# Altium PCB PCB2.PcbDoc
Units mil, origin at the board's own origin, x right, y up, seen from the top; angles counter-clockwise.
Board outline 6310 x 8345 mil, 2 copper layers (Top Layer, Bottom Layer); 65 components, 75 nets, 230 pads, 63 vias.
Unrouted connection lines stored in the file: 1.
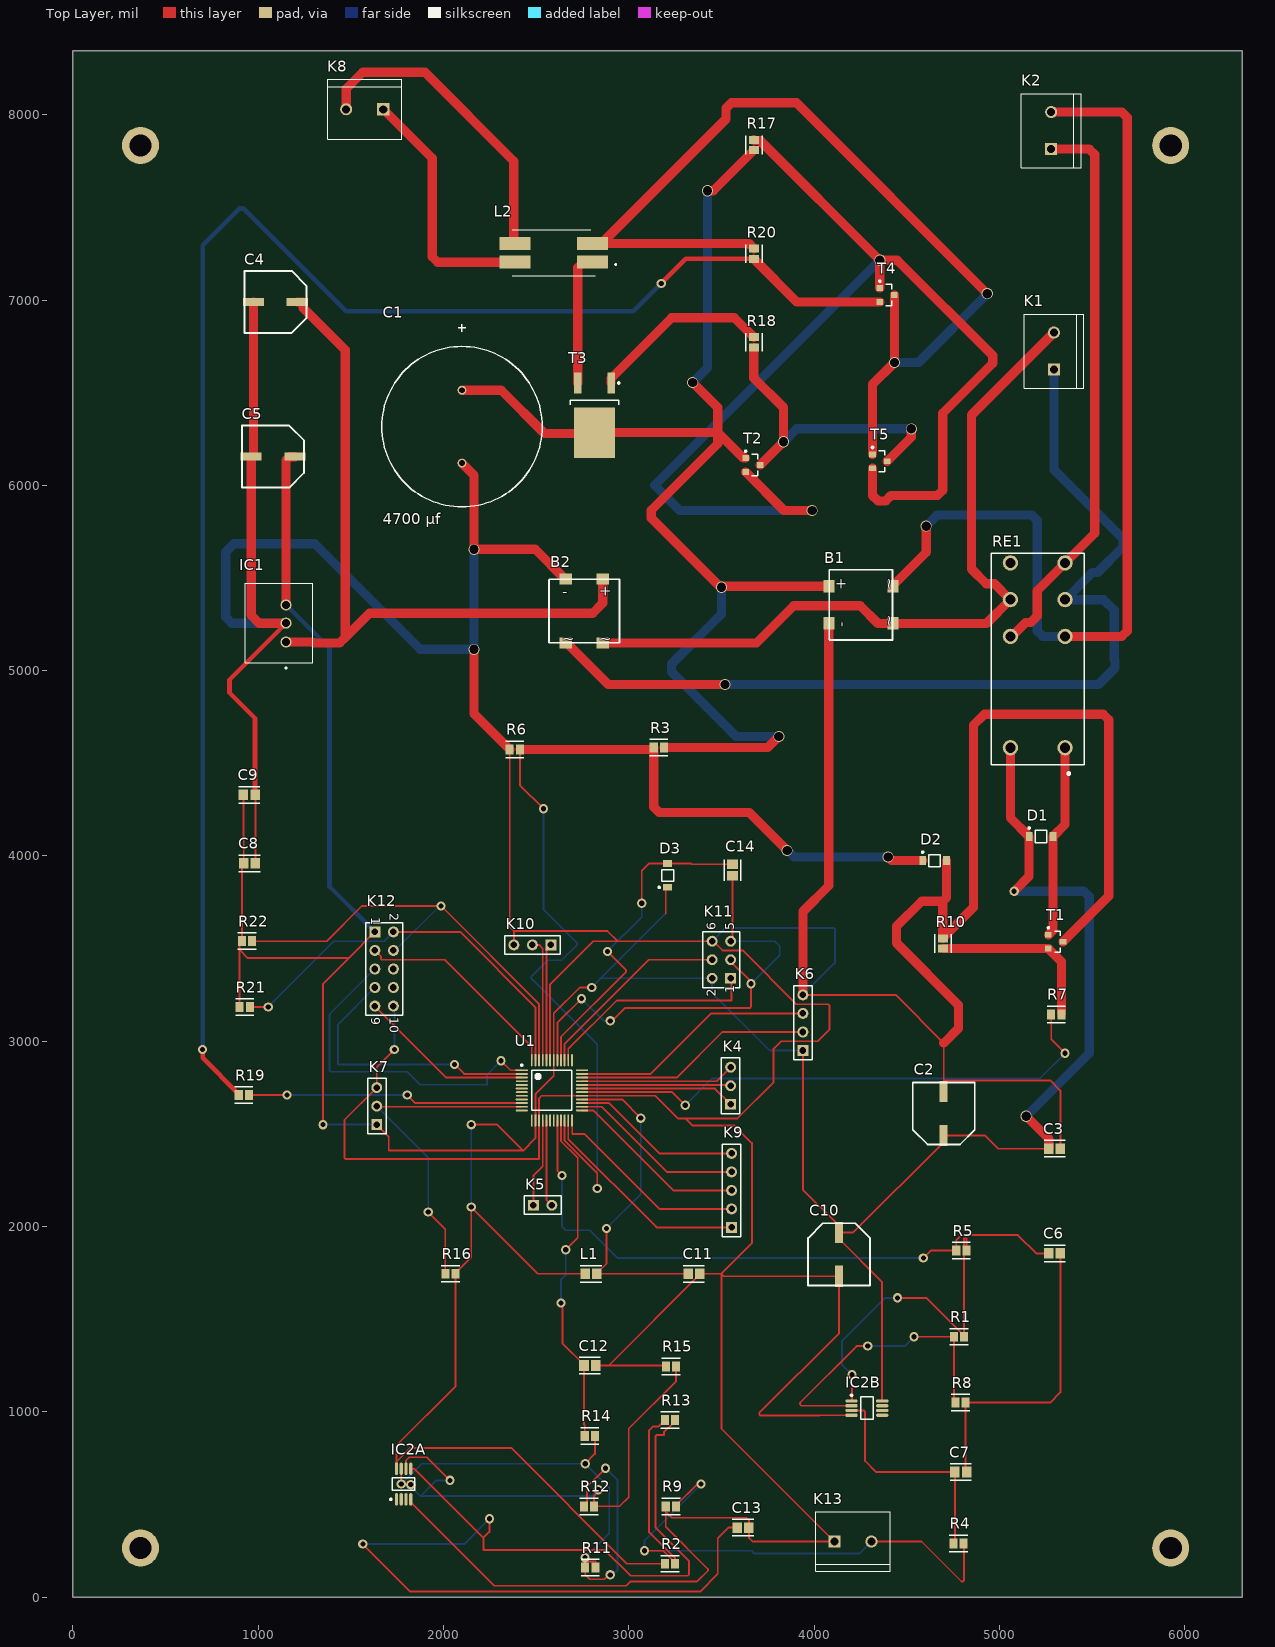
[diagram p0: Top Layer view]
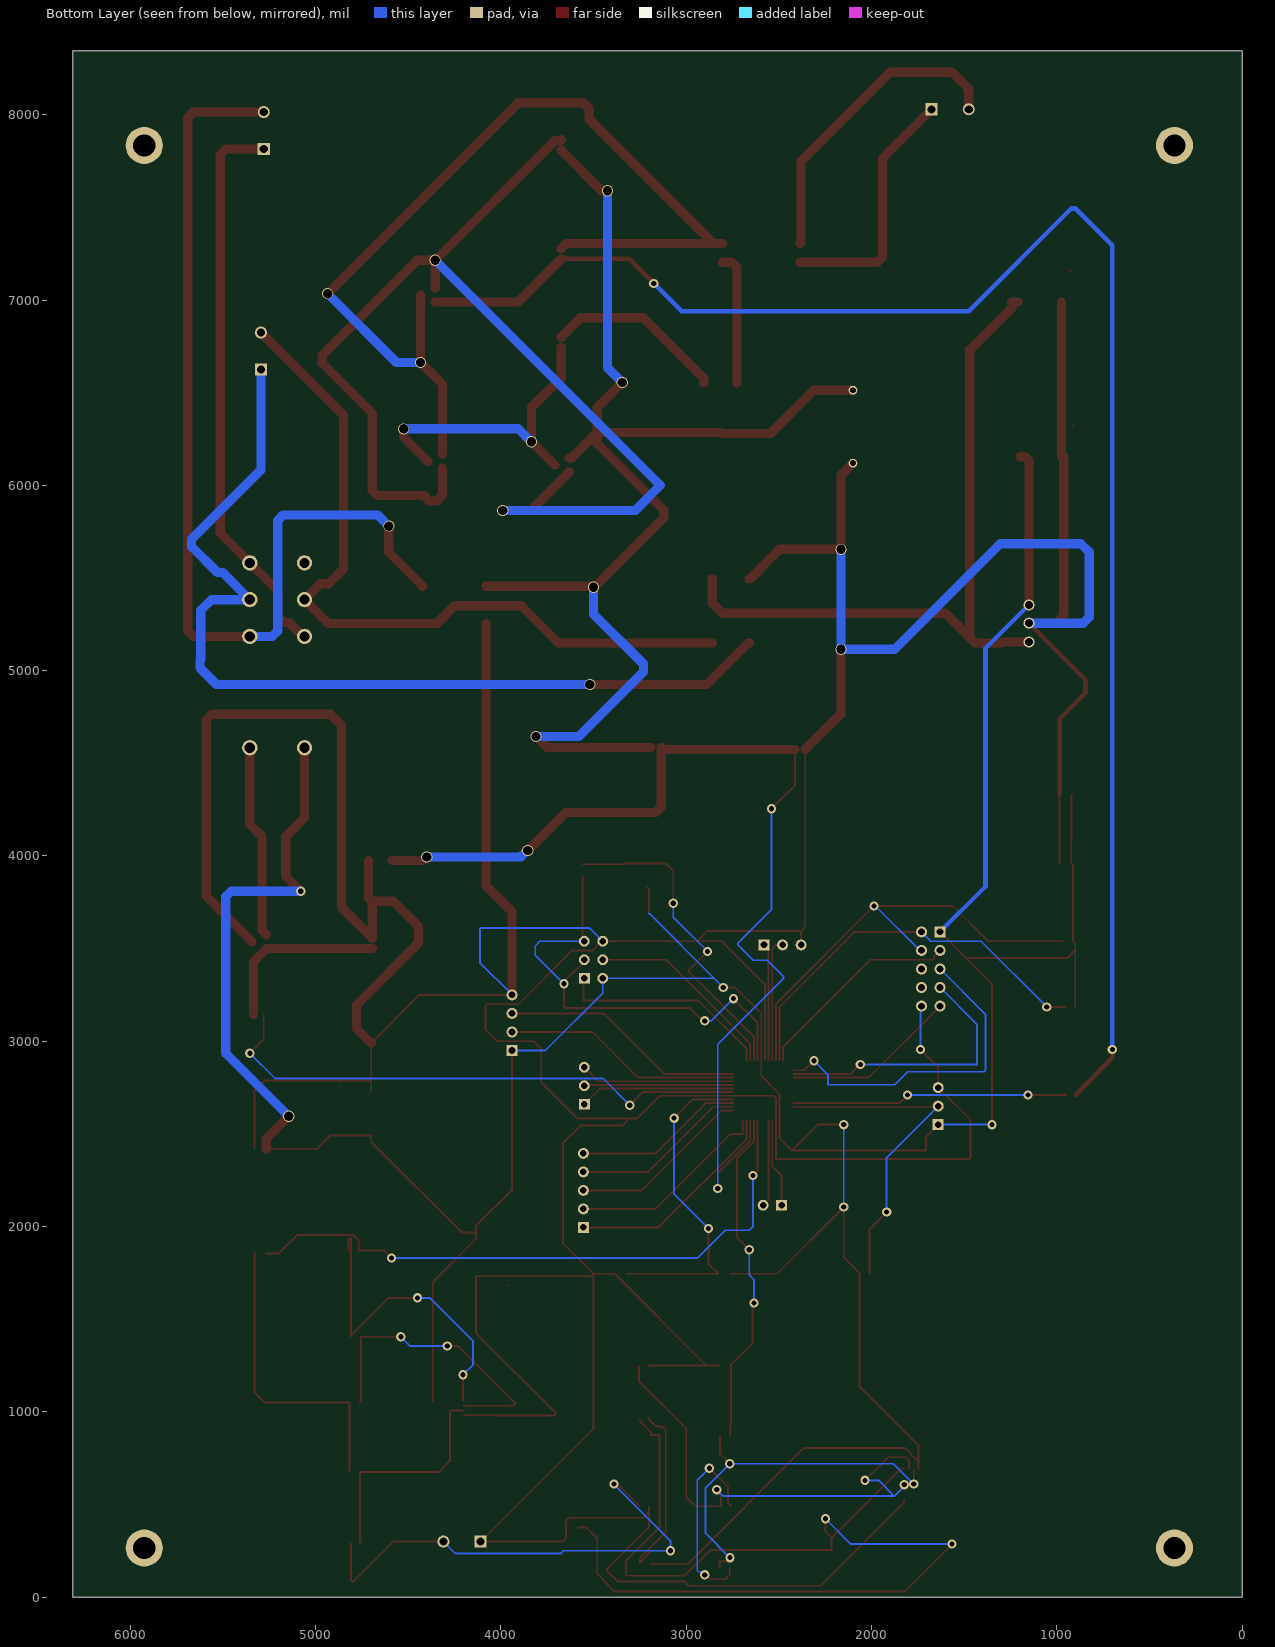
[diagram p1: Bottom Layer view, seen from below]
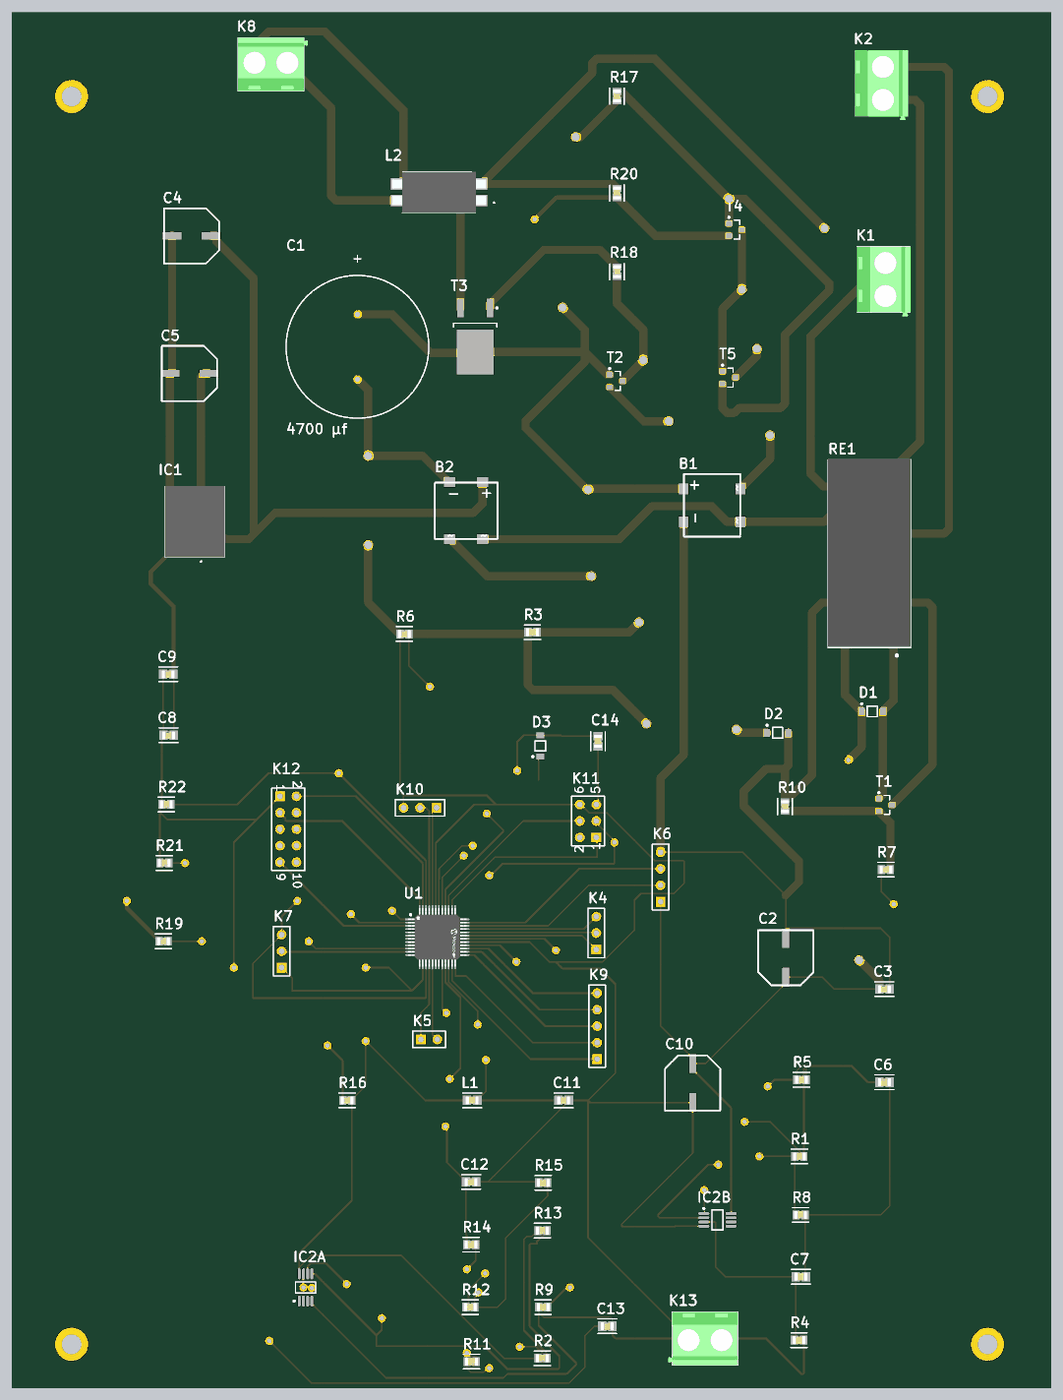
[diagram p2: 3D render of the assembled board from above, using the file's embedded part models]

## Layer stack, top to bottom
Top Solder: solder mask 0.4, Solder Resist, Dk 3.5
Top Layer: signal copper 1.4
Dielectric 1: dielectric 12.6, FR-4, Dk 4.8
Bottom Layer: signal copper 1.4
Bottom Solder: solder mask 0.4, Solder Resist, Dk 3.5

## Board outline
0,0 6310,0 6310,8345 0,8345

## Design rules (kind name [scope] priority, off if disabled: settings)
Clearance smd [All] p1: gap=10 ignorepadtopadclearanceinfootprint=TRUE except(0: Arc-Hole Track-Hole SMDPad-Hole THPad-Hole Via-Hole Fill-Hole Poly-Hole Region-Hole Text-Hole; 1: Arc-Arc Arc-Track Arc-SMDPad Arc-THPad Arc-Via Track-Track Track-SMDPad Track-THPad Track-Via SMDPad-SMDPad SMDPad-THPad SMDPad-Via THPad-THPad THPad-Via Via-Via)
PolygonConnect [All] p1: connectstyle=Relief reliefconductorwidth=10 reliefentries=4 polygonreliefangle="90 Angle" airgapwidth=10
RoutingVias [All] p1: holewidth=28 width=50 viastyle="Through Hole" minholewidth=28 minwidth=50 maxholewidth=28 maxwidth=50
SolderMaskExpansion [All] p1: expansion=4 istentingtop=FALSE
Width width [All] p1: maxlimit=50 minlimit=10 preferedwidth=10 minimp=50.000000 maximp=50.000000 favimp=50.000000
30 further rules are at their usual default settings.

## Classes and differential pairs
component class voeding: B1 B2 C1 C4 C5 D1 D2 IC1 K1 K2 R3 R6 R7 R10 RE1 T1
component class SolBout: K8 L2 R17 R18 R20 T2 T3 T4 T5
component class I2C: C2 C3 C6 C7 C12 C13 IC2A IC2B K13 R1 R2 R4 R5 R8 R9 R11 R12 R13 R14 R15
component class CPU: C8 C9 C10 C11 C14 D3 K4 K5 K6 K7 K9 K10 K11 K12 L1 R16 R19 R21 R22 U1

## Components (designator, comment, footprint, x,y, rotation, side; value= is the part's Value field where it differs from the comment)
B1 "D6KB6U" ttf 4255,5355 r90 top
B2 "D6KB6U" ttf 2760,5320 r0 top
C1 "4700 μf" CE_D22_L35_plugin 2100,6120 r90 top
C2 "10 uf" CE_D8_L10 4700,2610 r270 top
C3 "100 nf" CC_0805_L 5298.47,2420 r0 top value="0.22 μF"
C4 "100 μf   25V" CE_D8_L10 1093.11,6990 r0 top
C5 "10 μf   50V" CE_D8_L10 1080,6155 r0 top
C6 "10 nf" CC_0805_L 5298.47,1855 r0 top value="0.22 μF"
C7 "10 nf" CC_0805_L 4791.53,675 r0 top value="0.22 μF"
C8 "100 nf" CC_0805_L 953.47,3960 r0 top value="0.22 μF"
C9 "100 nf" CC_0805_L 951.53,4330 r0 top value="0.22 μF"
C10 "10 μf" CE_D8_L10 4135,1850 r90 top
C11 "100 nf" CC_0805_L 3351.53,1745 r0 top value="0.22 μF"
C12 "10nf" CC_0805_L 2790,1250 r0 top value="0.22 μF"
C13 "10nf" CC_0805_L 3616.53,375 r0 top value="0.22 μF"
C14 "100 nF" CC_0805_L 3560,3923.47 r270 top value="0.22 μF"
D1 "1N4007" SOD-123FL 5225,4105 r0 top value=15pF
D2 "5V1" SOD-123FL 4650.63,3975 r0 top
D3 "1N4148" SOD-123FL 3210,3895 r90 top value=15pF
IC1 "OKI-78SR-5/1.5-W36-C" OKI78SR515W36C 1150,5154.21 r90 top
IC2A "" MSOP_8_M 1785,610 r90 top
IC2B "" MSOP_8_M 4285,1020 r0 top
K1 "282837-2" TE_282837-2 5295,6725 r90 top
K2 "282837-2" TE_282837-2 5280,7915 r90 top
K4 "" HDR1X3 3550,2660 r90 top
K5 "" HDR1X2 2485,2115 r0 top
K6 "" HDR1X4 3940,2950 r90 top
K7 "" HDR1X3 1640,2550 r90 top
K8 "282837-2" TE_282837-2 1575,8030 r180 top
K9 "" HDR1X5 3555,1995 r90 top
K10 "" HDR1X3 2580,3520 r180 top
K11 "" HDR2X3 3550,3340 r90 top
K12 "" HDR2X5 1630,3590 r270 top
K13 "282837-2" TE_282837-2 4210,300 r0 top
L1 "10 μH" CC_0805_L 2796.53,1745 r180 top
L2 "" 2545 2595,7255 r90 top
R1 "18K" CC_0805_m 4782.41,1405 r180 top
R2 "1M" CC_0805_m 3222.41,180 r180 top
R3 "68K" CC_0805_m 3162.41,4585 r0 top
R4 "5K6" CC_0805_m 4780,290 r0 top
R5 "5K6" CC_0805_m 4795,1870 r0 top
R6 "10K" CC_0805_m 2385,4575 r0 top
R7 "10K" CC_0805_m 5307.59,3145 r0 top
R8 "100" CC_0805_m 4790,1050 r180 top
R9 "10M" CC_0805_m 3227.41,490 r0 top
R10 "4K7" CC_0805_m 4695,3527.59 r90 top
R11 "18K" CC_0805_m 2792.59,160 r180 top
R12 "18K" CC_0805_m 2785,490 r0 top
R13 "5K6" CC_0805_m 3222.59,955 r180 top
R14 "5K6" CC_0805_m 2790,870 r0 top
R15 "100" CC_0805_m 3227.59,1245 r0 top
R16 "4K7" CC_0805_m 2037.59,1745 r0 top
R17 "4K7" CC_0805_m 3675,7837.59 r270 top
R18 "100" CC_0805_m 3675,6772.41 r90 top
R19 "10K" CC_0805_m 922.59,2710 r0 top
R20 "4K7" CC_0805_m 3675,7250 r270 top
R21 "4K7" CC_0805_m 927.59,3185 r180 top
R22 "4K7" CC_0805_m 940,3540 r180 top
RE1 "" RT42 5207.36,4584.21 r90 top
T1 "BC547" SOT_23 5304.37,3537.4 r0 top
T2 "BC547" SOT_23 3670,6110 r0 top
T3 "IRF9Z34NPBF" TO_252 2815,6379.49 r270 top
T4 "BC547" SOT_23 4394.37,7027.6 r0 top
T5 "BC557" SOT_23 4355,6130 r0 top
U1 "ATMEGA4809" TQFP_48_M 2585,2735 r0 top

## Footprints (in the part's own frame and the unit in brackets; to place one, negate y for a bottom-side part, rotate by r counter-clockwise, add the part's x,y. Pads: shape width x height; smd on the part's side, far side on the other; paste and mask are expansions set on the pad)
2545 [mm]
  rect 1.78x4.27 smd: 1(-1.27,-5.305) 2(1.27,-5.305) 3(1.27,5.305) 4(-1.27,5.305)
  silkscreen extent -3.15,-8.6 3.15,5.69, body extent -3.15,-7.26 3.15,7.26, height 9.6
CC_0805_L [mil]
  rect 51.36x57.33 smd paste+0 mask+0: 1(-31.53,0) 2(31.53,0)
  silkscreen extent -57,-44 57,44, body extent -67,-39 67,39, height 10
CC_0805_m [mil]
  rect 43.49x53.39 smd paste+0 mask+0: 1(-27.59,0) 2(27.59,0)
  silkscreen extent -49,-44 49,44, body extent -53,-32 53,32, height 10
CE_D8_L10 [mm]
  rect 2.9x1.1 smd: 1(-3,0) 2(3,0)
  Top Layer lines w0.254: -4.25,4.241 -4.259,4.25
  silkscreen extent -4.26,-4.25 4.25,4.25
CE_D22_L35_plugin [mm]
  round 1.2 hole 0.8: 1(0,0) 2(10,0)
  silkscreen extent -6,-11 19.05,11
HDR1X2 [mm] "Connector; Header; 2 Position"
  rect 1.5x1.5 hole 0.9: 1(0,0)
  round 1.5 hole 0.9: 2(2.54,0)
  silkscreen extent -1.27,-1.27 3.81,1.27
HDR1X3 [mm] "Connector; Header; 3 Position"
  rect 1.5x1.5 hole 0.9: 1(0,0)
  round 1.5 hole 0.9: 2(2.54,0) 3(5.08,0)
  silkscreen extent -1.27,-1.27 6.35,1.27
HDR1X4 [mm] "Connector; Header; 4 Position"
  rect 1.5x1.5 hole 0.9: 1(0,0)
  round 1.5 hole 0.9: 2(2.54,0) 3(5.08,0) 4(7.62,0)
  silkscreen extent -1.27,-1.27 8.89,1.27
HDR1X5 [mm] "Connector; Header; 5 Position"
  rect 1.5x1.5 hole 0.9: 1(0,0)
  round 1.5 hole 0.9: 2(2.54,0) 3(5.08,0) 4(7.62,0) 5(10.16,0)
  silkscreen extent -1.27,-1.27 11.43,1.27
HDR2X3 [mm] "Connector; Header; 3x2 Position"
  rect 1.5x1.5 hole 0.9: 1(0,0)
  round 1.5 hole 0.9: 2(0,2.54) 3(2.54,0) 4(2.54,2.54) 5(5.08,0) 6(5.08,2.54)
  silkscreen extent -1.27,-1.27 6.35,3.81
HDR2X5 [mm] "Connector; Header; 5x2 Position"
  rect 1.5x1.5 hole 0.9: 1(0,0)
  round 1.5 hole 0.9: 2(0,2.54) 3(2.54,0) 4(2.54,2.54) 5(5.08,0) 6(5.08,2.54) 7(7.62,0) 8(7.62,2.54) 9(10.16,0) 10(10.16,2.54)
  silkscreen extent -1.27,-1.27 11.43,3.81
MSOP_8_M [mm] "TSOP, 8-Leads, Body 3x3mm, Pitch 0.65mm, IPC Medium Density"
  oval 1.7x0.45 smd: 1(-2.1,0.975) 2(-2.1,0.325) 3(-2.1,-0.325) 4(-2.1,-0.975) 5(2.1,-0.975) 6(2.1,-0.325) 7(2.1,0.325) 8(2.1,0.975)
  silkscreen extent -2.22,-1.55 0.85,1.87, body extent -1.55,-1.55 1.55,1.55, height 1.1
OKI78SR515W36C [mm]
  round 1.519 hole 1.08: 1(0,0) 2(2.6,0) 3(5.1,0)
  silkscreen extent -3.6,-3.7 8.05,5.6, body extent -2.85,-3.7 8.05,5.6, height 16.6
RT42 [mm]
  round 2.1 hole 1.4: 11(20.3,3.75) 12(15.26,3.75) 14(25.34,3.75) 21(20.3,-3.75) 22(15.26,-3.75) 24(25.34,-3.75) A1(0,3.75) A2(0,-3.75)
  silkscreen extent -3.67,-6.35 26.65,6.35, body extent -2.21,-6.35 26.79,6.35, height 15.86
SOD-123FL [mm] "SOD, 2-Leads, Body 2.7x1.65mm"
  rect 0.91x1.22 smd: 1(-1.635,0) 2(1.635,0)
  silkscreen extent -1.76,-0.82 0.78,1.28, body extent -1.35,-0.82 1.35,0.82, height 1
SOT_23 [mm] "SOT23, 3-Leads, Body 2.92x1.3mm, Pitch 0.95mm"
  rect 0.9x0.8 smd: 1(-1,0.95) 2(-1,-0.95) 3(1,0)
  silkscreen extent -1.12,-1.46 0.65,2.02, body extent -0.65,-1.46 0.65,1.46, height 1.11
TE_282837-2 [mm]
  rect 1.65x1.65 / inner round 1.65 / far side rect 1.65x1.65 hole 1.1: 1(-2.54,0)
  round 1.65 hole 1.1: 2(2.54,0)
  silkscreen extent -5.08,-4.1 5.08,4.1, body extent -5.68,-4.1 5.08,4.1, height 10
TO_252 [mm] "DPAK, 3-Leads, Body 6.5x6.12mm, Pitch 2.28mm, IPC Low Density"
  rect 2.85x1 smd: 1(-4.4,2.28) 3(-4.4,-2.28)
  rect 6.9x5.65 smd: 2(2.4,0)
  silkscreen extent -4.52,-3.35 -1.45,3.46, body extent -2.05,-3.32 4.17,3.32, height 2.35
TQFP_48_M [mm]
  rect 1.655x0.252 smd paste+0 mask+0: 1(-4.125,2.75)
  rrect100% 1.655x0.252 smd paste+0 mask+0: 2(-4.125,2.25) 3(-4.125,1.75) 4(-4.125,1.25) 5(-4.125,0.75) 6(-4.125,0.25) 7(-4.125,-0.25) 8(-4.125,-0.75) 9(-4.125,-1.25) 10(-4.125,-1.75) 11(-4.125,-2.25) 12(-4.125,-2.75) 25(4.125,-2.75) 26(4.125,-2.25) 27(4.125,-1.75) 28(4.125,-1.25) 29(4.125,-0.75) 30(4.125,-0.25) 31(4.125,0.25) 32(4.125,0.75) 33(4.125,1.25) 34(4.125,1.75) 35(4.125,2.25) 36(4.125,2.75)
  rrect100% 0.252x1.655 smd paste+0 mask+0: 13(-2.75,-4.125) 14(-2.25,-4.125) 15(-1.75,-4.125) 16(-1.25,-4.125) 17(-0.75,-4.125) 18(-0.25,-4.125) 19(0.25,-4.125) 20(0.75,-4.125) 21(1.25,-4.125) 22(1.75,-4.125) 23(2.25,-4.125) 24(2.75,-4.125) 37(2.75,4.125) 38(2.25,4.125) 39(1.75,4.125) 40(1.25,4.125) 41(0.75,4.125) 42(0.25,4.125) 43(-0.25,4.125) 44(-0.75,4.125) 45(-1.25,4.125) 46(-1.75,4.125) 47(-2.25,4.125) 48(-2.75,4.125)
  silkscreen extent -4.25,-2.75 2.75,3.58, body extent -5.2,-5.2 5.2,5.2, height 0.25
ttf [mm]
  rect 1.7x1.5 smd: 1(2.54,4.445) 2(-2.54,4.445) 3(-2.54,-4.318) 4(2.54,-4.318)
  silkscreen extent -4.83,-4.3 4.83,4.4

## Part data
B1 B2: library part Bridge_Rectifier, Average Rectified Current-Max=0.8A, Forward Voltage=1V, Manufacturer="Diodes Inc", Package Description="4-Pin Small Outline Integrated Circuit, Body 4.7 x 3.8 mm, Pitch 2.5 mm", Package Reference=MiniDIP-4, Package Version=05/2016, Peak Current-Max=30A, Reverse Current-Max=5µA, Reverse Voltage-Max [Vrrm]=600V, Datasheet URL=http://www.diodes.com/_files/datasheets/ds17003.pdf, Datasheet Version="Rev. 13-2, 12/2010", Manufacturer URL=http://www.diodes.com/, Mounting Technology=SurfaceMount, Package URL=http://www.diodes.com/_files/packages/MiniDIP.pdf
C1 C2 C4 C5 C10: library part Capacitor_Electrolytic, Manufacturer=Panasonic, Max Operating Temperature="105 degC", Min Operating Temperature="-55 degC", Package Quantity=500, Voltage Rating="25 V", ComponentLink1Description="Manufacturer URL", ComponentLink1URL=http://www.panasonic.com/, ComponentLink2Description=Datasheet, ComponentLink2URL=http://industrial.panasonic.com/cdbs/www-data/pdf/RDE0000/ABA0000C1181.pdf, DatasheetVersion=03/2016, Height="10.2 mm", Lead Pitch="3.1 mm", Length="10.2 mm", Mount="Surface Mount", Mounting Technology="Surface Mount", PackageDescription="2-Pin Electrolytic Aluminum Capacitor, Body 8.3 x 8.3 mm", PackageReference=EEE-FK1E221P, Packaging="Tape and Reel", Pins=2, REACH SVHC="No SVHC", RoHSCompliant=true
C3 C6 C7 C8 C9 C11 C12 C13 C14: library part Capacitor_Ceramic, Capacitance="0.22 μF", Manufacturer=KEMET, Manufacturer Part Number=C0805C224K5RACTU, Package=C0805C-DN, Temperature="-55°C to +125°C", Temperature Characteristic=X7R, Temperature Coefficient=30ppm/°C, Temperature Range High=+125°C, Temperature Range Low=-55°C, Tolerance=0.1, Voltage Rating="50 V", Automotive=No, Category=Cap, ComponentLink2Description=Datasheet, ComponentLink2URL=https://content.kemet.com/datasheets/KEM_C1003_C0G_SMD.pdf, Device Class L1="Passive Components", Device Class L2=Capacitors, Device Class L3="Ceramic Capacitors", Digikey Description="CAP CER 0.22UF 50V X7R 0805", Height=0.88mm, Ipc Land Pattern Name=CAPC200125X78, Lead Free=Yes, Material=Ceramic, Mouser Description="CAP CER 0.22UF 50V X7R 0805", Octopart=https://octopart.com/c0805c224k5ractu-kemet-144670, RoHS=TRUE
D1: library part Diode, Capacitance=15pF, Forward Current=1A, Manufacturer=Diotec, Max Junction Temp=+175°C, Max Repetitive Reverse Voltage=1000V, Max Surge Forward Current=27A, Peak Reverse Current=5uA, Temperature="-50°C to +175°C", Temperature Range Low=-50°C, Automotive=No, Category=Diode, ComponentLink2Description=Datasheet, ComponentLink2URL=https://datasheet.octopart.com/1N4007-Diotec-datasheet-62346875.pdf, Device Class L1="Discrete Semiconductors", Device Class L2=Diodes, Device Class L3="Rectifier Diodes", Height=2.8mm, Ipc Land Pattern Name=DIOAD888W100L520D280, Lead Free=Yes, Manufacturer Part Number=1N4007, Octopart=https://octopart.com/1n4007-diotec-4040411, Package=1N4007, Reverse Voltage=1000V, RoHS=TRUE, Temperature Range High=+175°C
D2: library part Zener_Diode, Manufacturer="On Semiconductor", PartNumber=1SMB5920BT3G, ComponentLink1Description="Manufacturer URL", ComponentLink1URL=http://www.onsemi.com/, ComponentLink2Description=Datasheet, ComponentLink2URL=http://www.onsemi.com/pub_link/Collateral/1SMB5913BT3-D.PDF, ComponentLink3Description="Package Specification", ComponentLink3URL=http://www.onsemi.com/pub_link/Collateral/1SMB5913BT3-D.PDF, DatasheetVersion="Rev. 8", Mounting Technology="Surface Mount", PackageDescription="2-Pin Small Molded Package, J-Bend Lead, Body 4.33 x 3.625 mm", PackageReference=SMB-2-403A-03_H, PackageVersion="Rev. H, 05/2011", Packing="Tape and Reel", RoHS=Pb-Free, VZ Typ (V)=6.2
D3: library part Diode, Capacitance=15pF, Forward Current=1A, Manufacturer=Diotec, Manufacturer Part Number=1N4007, Max Junction Temp=+175°C, Max Repetitive Reverse Voltage=1000V, Max Surge Forward Current=27A, Peak Reverse Current=5uA, Temperature="-50°C to +175°C", Temperature Range Low=-50°C, Automotive=No, Category=Diode, ComponentLink2Description=Datasheet, ComponentLink2URL=https://datasheet.octopart.com/1N4007-Diotec-datasheet-62346875.pdf, Device Class L1="Discrete Semiconductors", Device Class L2=Diodes, Device Class L3="Rectifier Diodes", Height=2.8mm, Ipc Land Pattern Name=DIOAD888W100L520D280, Lead Free=Yes, Octopart=https://octopart.com/1n4007-diotec-4040411, Package=1N4007, Reverse Voltage=1000V, RoHS=TRUE, Temperature Range High=+175°C
IC1: library part "DC/DC Converter", Current - Output (Max)=1.5A, Manufacturer=Murata, Operating Temperature=-40degC~85degC, Package / Case=3-SIPModule, Power (Watts) - Manufacture Series=8W, Voltage - Input (Max)=36V, Voltage - Input (Min)=7V, Voltage - Isolation=-, Voltage - Output 1=5V, Applications=ITE(Commercial), Category=PowerSupplies-BoardMount, Datasheet URL=https://datasheet.ciiva.com/8006/1790439-8006672.pdf, Datasheet Version=Oct-13, Efficiency=90.5%, Family=DCDCConverters, Features=SCP, Manufacturer URL=http://www.murata.com/, Mounting Type=ThroughHole, Number of Outputs=1, Packaging=Tube, Power (Watts) - Max=8W, Series=Okami™OKI-78SR, Size / Dimension="0.41\"Lx0.30\"Wx0.65\"H(10.4mmx7.6mmx16.5mm)", Type=LinearRegulatorReplacement, Voltage - Output 2=-, Voltage - Output 3=-
IC2A IC2B: library part Dual_Opamp, Case/Package=PDIP, Input Bias Current=1pA, Input Offset Voltage (Vos)=4.5mV, Max Operating Temperature=125°C, Max Supply Voltage=6V, Min Operating Temperature=-40°C, Min Supply Voltage=1.8V, Nominal Supply Current=100uA, Operating Supply Voltage=5.5V, Output Current=23mA, Package Quantity=60, Power Supply Rejection Ratio (PSRR)=86dB, Voltage Gain=112dB, Amplifier Type="GENERAL PURPOSE", Bandwidth=1MHz, Common Mode Rejection Ratio=60dB, Gain Bandwidth Product=1MHz, Height=3.3mm, Input Offset Voltage-Max=4.5mV, Lead Free="Lead Free", Length=9.27mm, Mount="Through Hole", Number of Amplifiers=2, Number of Channels=2, Number Of Circuits=2, Number of Elements=2, Number of Pins=8, Operating Supply Current=100uA, Output Current per Channel=23mA, Packaging=Rail/Tube, Radiation Hardening=No, REACH SVHC="No SVHC", RoHS Compliant=Yes, Slew Rate=0.6V/µs, Slew Rate-Nom=0.6V/µs, Supply Current=100uA, Technology=CMOS, Unity Gain Bandwidth Product=1MHz, Width=6.35mm
K1 K2 K8 K13: "Ð Ð°Ð·ÑŠÐµÐ¼Ð½Ñ‹Ðµ ÐºÐ»ÐµÐ¼Ð¼Ð½Ñ‹Ðµ ÐºÐ¾Ð»Ð¾Ð´ÐºÐ¸ Ð Ð¾Ð·ÐµÑ‚ÐºÐ° 2 Ð¿Ð¾Ð»Ð¾Ð¶ÐµÐ½Ð¸Ñ 5,08 Ð¼Ð¼ ÐŸÑ€Ð¸Ð¿Ð¾Ð¹ Ð¿Ñ€ÑÐ¼Ð¾Ð¹ Ñ‡ÐµÑ€ÐµÐ· Ð¾Ñ‚Ð²ÐµÑ€ÑÑ‚Ð¸Ðµ 13,5 Ð / ÐºÐ¾Ð½Ñ‚Ð°ÐºÑ‚", Package=None, Availability="In Stock", Check_prices=https://www.snapeda.com/parts/282837-2/TE+Connectivity+AMP+Connectors/view-part/?ref=eda, MF="TE Connectivity", MP=282837-2, Price=None, Purchase-URL=https://pricing.snapeda.com/search/part/282837-2/?ref=eda, SnapEDA_Link=https://www.snapeda.com/parts/282837-2/TE+Connectivity+AMP+Connectors/view-part/?ref=snap
K4 K7 K10: library part "Header 3", "Header, 3-Pin", LatestRevisionDate=17-Jul-2002, LatestRevisionNote="Re-released for DXP Platform.", Publisher="Altium Limited"
K5: library part "Header 2", "Header, 2-Pin", LatestRevisionDate=17-Jul-2002, LatestRevisionNote="Re-released for DXP Platform.", Publisher="Altium Limited"
K6: library part "Header 4", "Header, 4-Pin", LatestRevisionDate=17-Jul-2002, LatestRevisionNote="Re-released for DXP Platform.", Publisher="Altium Limited"
K9: library part "Header 5", "Header, 5-Pin", LatestRevisionDate=17-Jul-2002, LatestRevisionNote="Re-released for DXP Platform.", Publisher="Altium Limited"
K11: library part "Header 3X2", "Header, 3-Pin, Dual row", LatestRevisionDate=17-Jul-2002, LatestRevisionNote="Re-released for DXP Platform.", Publisher="Altium Limited"
K12: library part "Header 5X2", "Header, 5-Pin, Dual row", LatestRevisionDate=17-Jul-2002, LatestRevisionNote="Re-released for DXP Platform.", Publisher="Altium Limited"
L1: library part Choke, Case/Package=1350, Current Rating=8.5A, DC Resistance (DCR)=14.1mR, Inductance=10uH, Inductance Tolerance=20%, Max Operating Temperature=155°C, Min Operating Temperature=-40°C, Package Quantity=1, Ratings=AEC-Q200, Resistor Type=Wirewound, Saturation Current=10A, Self Resonant Frequency=18MHz, Series Resistance=14.1R, Test Frequency=100kHz, Height=4.7mm, Height - Seated (Max)=0.197inch, Length=0.512inch, Max DC Current=8.5A, Mount="Surface Mount", Packaging="Tape and Reel", RMS Current (Irms)=8.5A, RoHS Compliant=Yes, Series=WE-HCI, Shielding=Shielded, Termination=SMD/SMT, Tolerance=20%, Width=12.8mm
L2: library part Common_Mode_Choke, Case/Package=1808, Current=2A, Current Rating=2.3A, DC Resistance (DCR)=60mR, Insulation Resistance=10MR, Max Operating Temperature=85°C, Max Voltage Rating (DC)=50V, Min Operating Temperature=-40°C, Package Quantity=1, Test Frequency=100MHz, DC Current=2A, DC Resistance-Max=60mR, Depth=4.7mm, Element Configuration=Dual, Height=2mm, Impedance=900R, Lead Free="Lead Free", Length=0.185inch, Max Current Rating=2A, Max DC Current=2A, Mount="Surface Mount", Number of Lines=2, Number of Pins=4, Packaging="Tape and Reel", Radiation Hardening=No, REACH SVHC="No SVHC", RoHS Compliant=Yes, Series=ACM, Termination=Flat, Voltage Rating=50V, Voltage Rating (DC)=50V, Width=4.5mm
R1 R2 R3 R4 R5 R6 R7 R8 R9 R10 R11 R12 R13 R14 R15 R16 R17 R18 R19 R20 R21 R22: library part Resistor, Manufacturer="Vishay Dale", Part Number=CRCW08050000Z0EA
RE1: library part RELAY_GENERAL_PURPOSE, Ambient Temperature Range High=+85°C, Ambient Temperature Range Low=-40°C, Coil Power=403mW, Coil Resistance=62Ω, Coil Voltage=5V, Current Rating=8A, Manufacturer="TE Connectivity", Manufacturer Part Number=RT424005, Automotive=No, Category=Relay, Coil Type=Non-Latching, ComponentLink2Description=Datasheet, ComponentLink2URL=https://www.te.com/commerce/DocumentDelivery/DDEController?Action=showdoc&DocId=Data+Sheet%7FRT2%7F1014%7Fpdf%7FEnglish%7FENG_DS_RT2_1014.pdf%7F5-1393243-9, Device Class L1=Electromechanical, Device Class L2=Relays, Device Class L3="Power Relays", Digikey Description="RELAY GENERAL PURPOSE DPDT 8A 5V", Height=15.7mm, Lead Free=Yes, Mouser Description="General Purpose Relay, Rt2 Series, Power, Non Latching, Dpdt, 5 Vdc, 8 A Rohs Compliant: Yes", Number Of Contacts=2, Octopart=https://octopart.com/5-1393243-9-te+connectivity-41835766, Package=RT424005, RoHS=TRUE, Throw Configuration=DPDT
T1 T2 T4: library part Transistor_NPN, Manufacturer="On Semiconductor", PartNumber=BC547C, ComponentLink1Description="Manufacturer URL", ComponentLink1URL=http://www.onsemi.com/, ComponentLink2Description=Datasheet, ComponentLink2URL=http://www.onsemi.com/pub_link/Collateral/BC546-D.PDF, ComponentLink3Description="Package Specification", ComponentLink3URL=http://www.onsemi.cn/pub_link/Collateral/2N6426-D.PDF, DatasheetVersion="Rev. 7", fT Min (MHz)=150, IC Continuous (A)=0.1, Mounting Technology="Through Hole", PackageDescription="3-Pin Transistor Outline, Body 4.825 x 3.685 mm, Pitch 1.27 mm", PackageReference=TO-92-3-29-11_AM_SL, PackageVersion="Rev. AM", Packing="Bulk Box", Polarity=NPN, RoHS=FALSE
T3: library part MOSFET_P, Continuous Drain Current Id=2.4A, Current Temperature=25°C, Drain Source Voltage Vds=20V, Manufacturer="Fairchild Semiconductor", On Resistance Rds(on)=52mohm, Operating Temperature Max=150°C, Operating Temperature Min=-55°C, Operating Temperature Range=-55°Cto+150°C, Package / Case=SOT-23, Package Description="3-Pin Small Outline Transistor, Body 2.92 x 1.4 mm, Pitch 0.95 mm", Package Reference=SSOT3L, Package Version="Rev. 3, 05/2015", Power Dissipation Pd=500mW, Pulse Current Idm=10A, Rds(on) Test Voltage Vgs=-4.5V, Threshold Voltage Vgs Typ=-800mV, Voltage Vds Typ=-20V, Voltage Vgs th Max=-1.5V, Current Id Max=2.4A, Datasheet URL=https://www.fairchildsemi.com/datasheets/FD/FDN304P.pdf, Datasheet Version="Rev. C, 01/2001", External Depth=2.5mm, External Length / Height=1.12mm, External Width=3.05mm, Full Power Rating Temperature=25°C, Manufacturer URL=https://www.fairchildsemi.com/, Mounting Technology=SurfaceMount, No. of Pins=3, Package URL=https://www.fairchildsemi.com/package-drawings/MA/MA03B.pdf, Reel Quantity=3000, SMD Marking=304P, SVHC=NoSVHC(19-Dec-2012), Tape Width=8mm, Termination Type=SMD, Transistor Case Style=SOT-23, Transistor Polarity=PChannel, Voltage Vds=20V, Voltage Vgs Max=-800mV, Voltage Vgs Rds on Measurement=-4.5V
T5: library part Transistor_PNP, Manufacturer="On Semiconductor", PartNumber=BC557C, ComponentLink1Description="Manufacturer URL", ComponentLink1URL=http://www.onsemi.com/, ComponentLink2Description=Datasheet, ComponentLink2URL=http://www.onsemi.com/pub_link/Collateral/BC556B-D.PDF, ComponentLink3Description="Package Specification", ComponentLink3URL=http://www.onsemi.cn/pub_link/Collateral/2N6426-D.PDF, DatasheetVersion="Rev. 3", IC Continuous (A)=-0.1, Mounting Technology="Through Hole", PackageDescription="3-Pin Transistor Outline, Body 4.825 x 3.685 mm, Pitch 1.27 mm", PackageReference=TO-92-3-29-11_AM_SL, PackageVersion="Rev. AM", Packing="Bulk Box", Polarity=PNP, RoHS=FALSE
U1: Case/Package=TQFP, Max Operating Temperature=85°C, Min Operating Temperature=-40°C, Core Architecture=AVR, Interface=I2C, Memory Size=48KB, Memory Type=FLASH, Mount="Surface Mount", Number of I/Os=41, Oscillator Type=Internal, Peripherals="Brown-out Detect/Reset", RoHS Compliant=Yes, Series="megaAVR® 0, Functional Safety (FuSa)"

## Free pads (board coordinates)
  round 200 hole 120: 2(365,265) 2(365,7835) 2(5925,265) 2(5925,7835)

## Via types
v1: diameter 50, hole 28, Top Layer to Bottom Layer, 46 vias
v2: diameter 60, hole 50, Top Layer to Bottom Layer, 17 vias

## Nets (pads, with @x,y where several pads share a name; then routed paths per layer and width w, separated by ;. In a path a pad name is that pad's centre, name@x,y a point inside that pad or via, vN(x,y) a via of type N, cw(c..) or ccw(c..) an arc to the next point about the centre after c; other vN are vias at no path point)
+5V: C2.2 C3.1 C5.2 C8.1 C9.1 C10.2 D1.1 D3.1 IC1.3 IC2A.8 IC2B.8 K6.1 K7.1 K11.2 K12.1 L1.2 R2.2 R16.2 R21.2 R22.2 RE1.A1 U1.14 U1.42 | length 21133.1
  Top Layer w10: R21.2 900,3493.59 ; C9.1 920,4100 921.95,4098.05 C8.1 912.41,3950.46 R22.2 900,3527.59 900,3493.59 ; v1(1350,2550) 1350,3310 1489,3449 ; K12.1 1489,3449 ; K7.1 1705,2485 1705,2410 2430,2410 ; IC2A.8 1746.61,730 ; v1(2150,2550) 2290,2550 2430,2410 ; L1.2 2510,1745 v1(2150,2105) 2150,1834.77 2065.18,1749.95 R16.2 2065.18,1137.57 1746.61,819 1746.61,730 ; v1(2800,3290) 2735.16,3290 2595.16,3150 2595.16,3084.84 2594.84,3084.84 U1.42 2594.84,2813.42 2496.42,2715 U1.14 2496.42,2476.42 2430,2410 ; R2.2 2990,180 2365,805 1821.61,805 1746.61,730 ; 3200,3690 3200,3820.63 D3.1 ; K6.1 3940,2198.54 4135,2003.54 C10.2 C10.2@4135,1968 ; IC2B.8 4367.68,1700 4135,1932.68 C10.2@4135,1968 ; C3.1 4994,2420 4922,2492 4700,2492 C2.2 4700,2456 4212,1968 C10.2@4135,1968 ; 900,3493.59 944.59,3449 1489,3449
  Top Layer w50: IC1.3 1150,6135.63 1169.37,6155 C5.2 ; RE1.A1 5059.72,4205.91 D1.1 5160.63,3890.63 v1(5080,3810) ; v2(5145,2595) 5266.95,2473.05 C3.1
  Bottom Layer w10: v1(1350,2550) K7.1 ; v1(2150,2105) v1(2150,2550) ; v1(2800,3290) 2850,3340 ; 3200,3690 2850,3340 ; K6.1 3760,2950 3450,3260 K11.2 2850,3340
  Bottom Layer w25: IC1.3 1384.82,5120.18 1384.82,3835.18 K12.1
  Bottom Layer w50: v1(5080,3810) 5455.71,3810 5485,3780.71 5485,2935 v2(5145,2595)
GND: B1.2 B2.2 C1.1 C2.1 C3.2 C4.1 C5.1 C8.2 C9.2 C10.1 C11.2 C12.2 C13.2 D2.2 IC1.2 IC2A.4 IC2B.4 K6.4 K7.3 K10.3 K11.6 K12.10 K13.1 R6.1 R9.1 R10.2 R15.1 T1.3 U1.15 U1.29 U1.43 | length 35631.9
  Top Layer w10: C9.2 983.05,4327 985,4327 C8.2 ; v1(1735,2955) 1640,2860 K7.3 1465,2575 1465,2370 1470,2365 2515,2365 2516.1,2366.1 U1.15 2516.1,2692.57 2529,2705.47 U1.29 3143.53,2705.47 3265,2584 3306,2584 ; IC2A.4 1823.39,512 2274.32,61.07 2985.88,61.07 3009.82,85 3370,85 3427.71,142.71 3427.71,150.99 3199.82,378.87 3199.82,460 ; R6.1 2357.41,3617.59 2380,3595 ; K10.3 2380,3595 ; U1.43 2575.16,3307.16 2808,3540 2940,3540 ; C12.2 2891.04,1250 ; R9.1 3199.82,460 ; R15.1 3200,1250 2891.04,1250 ; K6.4 4440,3250 4700,2990 4700,2789 ; IC2B.4 4028.62,981.61 4027.01,980 3710,980 3704.14,985.86 3704.14,994.14 4135,1425 C10.1 3513.11,1731.89 3500,1745 ; C2.1 4700,2789 ; C3.2 5330,2734 5275,2789 4700,2789 ; 2380,3595 2885,3595 2940,3540 ; 2891.04,1250 3383.05,1742.02 C11.2 3500,1745 ; 2940,3540 K11.6 3456,3540 3506,3490 3615,3490 3905,3200 4077.36,3200 4083.21,3194.14 4083.21,3063.21 4020,3000 3822,3000 3782,2960 3782,2779 3587,2584 3306,2584 ; 3199.82,460 3231.82,428 3635,428 3648.05,414.95 C13.2 3648.05,320 3668.05,300 K13.1 3500,910 3500,1745 ; 3306,2584 3345,2545 3570,2545 3665,2450 3665,1910 3500,1745
  Top Layer w25: C9.2 983.05,4741.95 845,4880 845,4951.57 IC1.2
  Top Layer w50: C4.1 975,6158.35 971.65,6155 C5.1 961.89,5299.29 1004.61,5256.57 IC1.2 ; C1.1 2165,6055 v2(2165,5655) 2496.06,5655 2656.06,5495 B2.2 ; v2(2165,5115) 2165,4767.41 2354.15,4578.26 2354.15,4576.7 2355.85,4575 R6.1 ; K6.4 3940,3700 4080,3840 B1.2 ; R10.2 R10.2@4695,3556.74 ; 4700,2990 4780,3070 4780,3195 4445,3530 4445,3620 4580.87,3755.87 4695,3755.87 ; D2.2 4715,3775.87 4695,3755.87 ; T1.3 5590,3783.66 5590,4735.71 5560.71,4765 4920,4765 4860,4705 4860,3721.74 R10.2@4695,3556.74 ; R10.2@4695,3556.74 4695,3755.87
  Bottom Layer w10: K12.10 1735,3185 v1(1735,2955) ; K11.6 3522.02,3612.02 4107.13,3612.02 4112.98,3606.16 4112.98,3422.98 K6.4
  Bottom Layer w50: IC1.2 857.72,5256.57 825,5289.29 825,5640 870,5685 1305,5685 1875,5115 v2(2165,5115) v2(2165,5655)
Net7-Segment_1: 
Net7-Segment_2: 
Net7-Segment_3: 
Net7-Segment_4: 
Net7-Segment_5: 
Net7-Segment_6: 
Net7-Segment_7: 
Net7-Segment_8: 
Net7-Segment_9: 
Net7-Segment_10: 
Net7-Segment_11: 
Net7-Segment_12: 
NetB1_3: B1.3 B2.4 K1.2 RE1.11 | length 4113.6
  Top Layer w50: B2.4 3690,5150 3890,5350 4250,5350 4345,5255 B1.3 4931.3,5255 RE1.11 4973.67,5469.48 4929.81,5469.48 4850,5549.29 4850,6380 K1.2
NetB1_4: B1.4 K2.2 RE1.22 | length 5335.8
  Top Layer w50: B1.4 4425,5458.94 4605,5638.94 v2(4605,5780) ; K2.2 5660.71,8015 5690,7985.71 5690,5214.29 5660.71,5185 RE1.22
  Bottom Layer w50: v2(4605,5780) 4665,5840 5175.71,5840 5205,5810.71 5205,5214.29 5234.29,5185 RE1.22
NetB2_1: B2.1 C4.2 IC1.1 | length 3865.5
  Top Layer w50: IC1.1 1294.58,5154.21 1298.79,5150 1440.71,5150 1470,5179.29 ; C4.2 1239.96,6990 1243.31,6986.65 1243.31,6957.91 1470,6731.22 1470,5179.29 ; B2.1 2860,5365 2805,5310 1600.71,5310 1470,5179.29
NetB2_3: B2.3 K1.1 RE1.21 | length 5240
  Top Layer w50: B2.3 2663.94,5150 2888.94,4925 v2(3520,4925)
  Bottom Layer w50: v2(3520,4925) 5535,4925 5624.29,5014.29 5624.29,5055.71 5620,5060 5620,5325.71 5562.29,5383.42 RE1.21 5501.06,5529.48 5529.48,5529.48 5669.29,5669.29 5669.29,5710.71 5295,6085 K1.1
NetC6_2: C6.2 C7.2 R8.1 | length 1662.5
  Top Layer w10: C7.2 4817.59,680.46 R8.1 5275,1050 5330,1105 C6.2
NetC7_1: C7.1 IC2B.3 R4.1 | length 1239.4
  Top Layer w10: IC2B.3 4269.14,1007.2 4275,1001.35 4275,735 4335,675 C7.1 4760,297.59 R4.1
NetC11_1: C11.1 L1.1 U1.28 | length 1789.4
  Top Layer w10: U1.28 2964.21,2685.79 v1(3065,2585) ; v1(2880,1990) 2880,1799.93 2828.05,1747.98 L1.1 C11.1
  Bottom Layer w10: v1(2880,1990) 3065,2175 v1(3065,2585)
NetC12_1: C12.1 R14.1 U1.21 | length 1831.1
  Top Layer w10: v1(2634,1587.16) 2643.08,1578.08 2643.08,1368.38 2758.47,1252.98 C12.1 2758.47,930.53 2762.41,926.59 R14.1 ; U1.21 2634.21,2460.79 2725,2370 2725,1940 v1(2660,1875)
  Bottom Layer w10: v1(2634,1587.16) 2634,1712.67 2660,1738.67 v1(2660,1875)
NetC13_1: C13.1 IC2A.5 R13.1 | length 5995.1
  Top Layer w10: v1(1565,286) 1821,30 3385,30 3480,125 3480,317 3538,375 C13.1 ; IC2A.5 1842.32,692.68 2215.39,319.61 ; v1(2248.08,423.08) 2248.08,352.31 2215.39,319.61 ; R13.1 3250.18,950.05 3189.82,889.69 3189.82,875 3150.86,875 3145,869.14 3145,375 3325,195 3325,120.86 3319.14,115 3010,115 2871,254 2215.39,254 2215.39,319.61
  Bottom Layer w10: v1(1565,286) 2111,286 v1(2248.08,423.08)
NetC14_1: C14.1 D3.2 U1.40 | length 1795.3
  Top Layer w10: U1.40 2634.21,3024.21 2985.86,3375.86 2985.86,3384.14 v1(2885,3485) ; v1(3070,3745) 3070,3920 3110,3960 3209.37,3960 D3.2 3336.63,3959.37 3341,3955 C14.1
  Bottom Layer w10: v1(2885,3485) 3070,3670 v1(3070,3745)
NetC14_2: C14.2 K11.3 K11.5 U1.41 | length 2586.7
  Top Layer w10: U1.41 2614.53,3099.53 v1(2745,3230) ; v1(2900,3110) 2905,3105 2980,3180 3654.14,3180 3660,3185.86 3660,3320 3550,3430 K11.3 ; K11.5 3560,3550 C14.2
  Bottom Layer w10: v1(2745,3230) 2865,3110 v1(2900,3110) ; K11.5 3789.14,3540 3815,3514.14 3815,3465 v1(3660,3310)
NetC16_2: 
NetC17_2: 
NetC18_2: 
NetD1_2: D1.2 RE1.A2 T1.1 | length 1046.7
  Top Layer w50: T1.1 5289.37,3599.17 D1.2 5355,4170.63 RE1.A2
NetD2_1: D2.1 R3.1 R6.2 U1.22 | length 5850.1
  Top Layer w10: R6.2 2412.59,4382.41 v1(2540,4255) ; U1.22 2653.9,2463.05 2830,2286.95 v1(2830,2205)
  Top Layer w50: R6.2 3123.26,4575 3133.26,4585 R3.1 3134.82,4264.29 3164.11,4235 3650,4235 v2(3855,4030) ; v2(4400,3995) 4420,3975 D2.1
  Bottom Layer w10: v1(2540,4255) 2540,3710 2720.86,3529.14 2720.86,3520.86 2637.07,3437.07 2562.07,3437.07 2474.14,3349.14 2474.14,3340.86 2830,2985 v1(2830,2205)
  Bottom Layer w50: v2(3855,4030) 3857.71,4030 3892.71,3995 v2(4400,3995)
NetIC2A_6: IC2A.6 R12.2 R15.2 | length 2719.8
  Top Layer w10: IC2A.6 1797.8,737.8 1815,755 1910,755 v1(2035,630) ; v1@1814.11,606.89 v1(1823.11,606.89) ; v1(2835,580) 2835,569.18 2812.59,546.77 R12.2 2950,490 3000,540 3000,910 3255.18,1165.18 R15.2
  Bottom Layer w10: v1(1823.11,606.89) 1823.11,597.89 1876,545 ; v1(2035,630) 1961,630 1876,545 ; v1(2835,580) 2800,545 1876,545
NetIC2A_7: IC2A.7 R11.1 R14.2 | length 2005.4
  Top Layer w10: v1(1772.2,610) IC2A.7 ; v1(2764,213) 2784,193 2820.18,193 R11.1 ; v1(2765,720) 2817.59,772.59 R14.2
  Bottom Layer w10: v1(1772.2,610) 1882.2,720 v1(2765,720) 2895,590 2895,344 v1(2764,213)
NetIC2B_1: IC2B.1 R1.1 R5.2 | length 1799.4
  Top Layer w10: IC2B.1 4205,1061.06 v1(4205,1200) ; v1(4450,1615) 4604.95,1615 R1.1@4810,1409.95 ; R1.1 R1.1@4810,1409.95 ; R5.2 4822.59,1937 4810,1937 R1.1@4810,1409.95
  Bottom Layer w10: v1(4205,1200) 4150,1255 4150,1380 4385,1615 v1(4450,1615)
NetIC2B_2: IC2B.2 R1.2 R8.2 | length 1626
  Top Layer w10: IC2B.2 3932.2,1032.8 3924.14,1040.86 3924.14,1049.14 4230,1355 v1(4290,1355) ; v1(4540,1405) R1.2 4754.82,1057.59 R8.2
  Bottom Layer w10: v1(4290,1355) 4490,1355 v1(4540,1405)
NetK2_1: K2.1 RE1.12 RE1.24 | length 3057.1
  Top Layer w50: RE1.12 5068.57,5185 5143.21,5259.64 5169.64,5259.64 5205,5295 5205,5431.85 RE1.24 5515,5741.85 5515,7785.71 5485.71,7815 K2.1
NetK4_1: K4.1 U1.31 | length 837.7
  Top Layer w10: U1.31 3465.16,2744.84 K4.1
NetK4_2: K4.2 U1.32 | length 804.5
  Top Layer w10: U1.32 3545.47,2764.53 K4.2
NetK4_3: K4.3 U1.33 | length 834
  Top Layer w10: U1.33 3474.21,2784.21 K4.3
NetK5_1: K5.1 U1.16 | length 478.6
  Top Layer w10: K5.1 2485,2275 2535.79,2325.79 U1.16
NetK5_2: K5.2 U1.17 | length 469.8
  Top Layer w10: U1.17 2555.47,2144.53 K5.2
NetK6_2: K6.2 U1.34 | length 1294.5
  Top Layer w10: U1.34 3258.9,2803.9 3505,3050 K6.2
NetK6_3: K6.3 U1.35 | length 1327.8
  Top Layer w10: U1.35 3118.58,2823.58 3445,3150 K6.3
NetK7_2: K7.2 R16.1 U1.11 | length 1842.3
  Top Layer w10: K7.2 1643.58,2646.42 U1.11 ; v1(1918.08,2078.08) 2010,1986.16 R16.1
  Bottom Layer w10: K7.2 1918.08,2371.92 v1(1918.08,2078.08)
NetK8_1: K8.1 L2.4 | length 1363.8
  Top Layer w50: K8.1 1940,7765 1940,7234.29 1969.29,7205 L2.4
NetK8_2: K8.2 L2.3 | length 1698.6
  Top Layer w50: K8.2 1475,8140 1565,8230 1900,8230 2380,7750 2380,7311.14 L2.3
NetK9_1: K9.1 U1.23 | length 1179.9
  Top Layer w10: U1.23 2673.58,2471.42 3150,1995 K9.1
NetK9_2: K9.2 U1.24 | length 1101.1
  Top Layer w10: U1.24 2695,2570.85 2695,2500 2760,2500 3165,2095 K9.2
NetK9_3: K9.3 U1.25 | length 986.4
  Top Layer w10: U1.25 2808.27,2626.73 3240,2195 K9.3
NetK9_4: K9.4 U1.26 | length 953.1
  Top Layer w10: U1.26 2853.58,2646.42 3205,2295 K9.4
NetK9_5: K9.5 U1.27 | length 919.9
  Top Layer w10: U1.27 2893.9,2666.1 3165,2395 K9.5
NetK10_1: K10.1 U1.44 | length 632.7
  Top Layer w10: U1.44 2555.47,3495.47 K10.1
NetK10_2: K10.2 U1.45 | length 666.7
  Top Layer w10: K10.2 2515.79,3520 2535.79,3500 U1.45
NetK11_1: K11.1 U1.38 | length 1172.9
  Top Layer w10: U1.38 2673.58,2958.58 2935,3220 3555,3220 3555,3335 K11.1
NetK11_4: K11.4 U1.39 | length 1072.8
  Top Layer w10: U1.39 2653.9,2986.1 3107.8,3440 K11.4
NetK12_2: K12.2 R21.1 U1.47 | length 2163.5
  Top Layer w10: R21.1 v1(1054,3185) ; K12.2 2090,3590 2496.42,3183.58 U1.47
  Bottom Layer w10: v1(1054,3185) 1409,3540 1680,3540 K12.2
NetK12_3: K12.3 U1.48 | length 1142.4
  Top Layer w10: K12.3 1662,3458 1662,3445.86 1667.86,3440 2007.73,3440 2476.73,2971 U1.48
NetK12_4: K12.4 R22.1 U1.46 | length 2506.3
  Top Layer w10: R22.1 1370,3540 1560,3730 v1(1987,3730) 2516.1,3200.9 U1.46
  Bottom Layer w10: K12.4 1738.5,3490 1978.5,3730 v1(1987,3730)
NetK12_5: K12.5 U1.1 | length 1827.1
  Top Layer w10: v1(2310,2895) 2361.73,2843.27 U1.1
  Bottom Layer w10: K12.5 1385,3145 1385,2840.86 1390.86,2835 1805,2835 1875,2765 2235,2765 2235,2820 v1(2310,2895)
NetK12_7: K12.7 U1.2 | length 1511.7
  Top Layer w10: v1(2060,2875) 2111.42,2823.58 U1.2
  Bottom Layer w10: K12.7 1430,3090 1430,2875 v1(2060,2875)
NetK12_9: K12.9 U1.3 | length 952.5
  Top Layer w10: K12.9 2016.1,2803.9 U1.3
NetK13_2: K13.2 R2.1 R4.2 R9.2 R13.2 | length 3819.7
  Top Layer w10: v1(3085,250) 3184.95,250 R2.1@3250,184.95 ; R13.2@3205,965 R13.2 3195,950.05 3178.26,933.3 3173.3,933.3 3160,920 3130,920 3110,900 3110,349 3250,209 R2.1 ; R9.2 3255,494.95 3370.05,610 v1(3390,610) ; K13.2 4580,300 4795.86,84.14 4804.14,84.14 4810,90 4810,287.59 R4.2
  Bottom Layer w10: v1(3390,610) 3085,305 v1(3085,250) 3662.91,250 3677.91,235 4245,235 K13.2
NetK14_2: 
NetK14_4: 
NetL2_1: L2.1 T3.3 | length 713.6
  Top Layer w50: T3.3 2725.24,7175.39 2754.84,7205 L2.1
NetL2_2: L2.2 R20.1 T4.3 T5.1 | length 5305.5
  Top Layer w50: L2.2 L2.2@2852.87,7305 ; R20.1 3675,7279.15 3649.15,7305 L2.2@2852.87,7305 ; T5.1 4315.63,6545.63 v2(4433.74,6663.74) T4.3 ; v2(4935,7035) 3905,8065 3554.29,8065 3525,8035.71 3525,7977.13 L2.2@2852.87,7305
  Bottom Layer w50: v2(4433.74,6663.74) 4563.74,6663.74 v2(4935,7035)
NetR7_1: R7.1 U1.30 | length 2993.7
  Top Layer w10: U1.30 3234.84,2725.16 v1(3305,2655) ; R7.1 5280,3010 v1(5355,2935)
  Bottom Layer w10: v1(3305,2655) 3448.83,2798.83 5218.83,2798.83 v1(5355,2935)
NetR7_2: R7.2 R10.1 T1.2 | length 954.1
  Top Layer w50: R10.1 T1.2 5335.18,3429.82 R7.2
NetR11_2: R11.2 R12.1 | length 1076.7
  Top Layer w10: R12.1 2774.15,506.74 2774.15,594.15 v1(2875,695) ; R11.2 2765,120 2789,96 2867.43,96 2891.43,120 v1(2900,120)
  Bottom Layer w10: v1(2875,695) 2940,630 2940,143.64 2932.93,136.57 2927.39,136.57 2910.82,120 v1(2900,120)
NetR17_1: R17.1 T2.2 T4.1 T5.2 | length 6387.8
  Top Layer w50: T2.2 3838.23,5865 v2@3985,5865 ; R17.1 3675,7863.62 3676.7,7861.92 3708.29,7861.92 v2(4355,7215.21) ; T5.2 4315.63,5945.63 4344.92,5916.34 4386.34,5916.34 4415,5945 4665.71,5945 4695,5974.29 4695,6390 4964.29,6659.29 4964.29,6700.71 4449.79,7215.21 v2(4355,7215.21) ; T4.1 v2(4355,7215.21)
  Bottom Layer w50: v2(3990,5865) 3275.21,5865 3140,6000.21 v2(4355,7215.21)
NetR18_1: R18.1 T2.3 T5.3 | length 1701
  Top Layer w50: R18.1 3675,6580 3835,6420 v2(3835,6235.63) T2.3 ; T5.3 4525,6260.63 v2(4525,6305)
  Bottom Layer w50: v2(3835,6235.63) 3837.71,6235.63 3907.08,6305 v2(4525,6305)
NetR18_2: R18.2 T3.1 | length 975.7
  Top Layer w50: T3.1 2904.76,6578.5 3231.26,6905 3570,6905 3671.74,6803.26 3673.3,6803.26 3675,6801.56 R18.2
NetR19_1: R19.1 R20.2 T4.2 | length 8847.3
  Top Layer w25: v1(700,2955) 700,2909.95 895,2714.95 R19.1 ; v1(3175,7090) 3307.41,7222.41 R20.2
  Top Layer w50: R20.2 3675,7220.85 3676.7,7219.15 3678.26,7219.15 3907.21,6990.2 T4.2
  Bottom Layer w25: v1(700,2955) 700,7295 899.64,7494.64 920.36,7494.64 1475,6940 3025,6940 v1(3175,7090)
NetR19_2: R19.2 U1.10 | length 1490.6
  Top Layer w10: R19.2 v1(1155,2710) ; v1(1805,2710) 1848.9,2666.1 U1.10
  Bottom Layer w10: v1(1155,2710) v1(1805,2710)
PD0: C6.1 R5.1 U1.20 | length 3405.9
  Top Layer w10: U1.20 2614.53,2300.47 v1(2640,2275) ; v1(4590,1830) 4630,1870 R5.1 4767.41,1926.41 4795,1954 5100,1954 5199,1855 C6.1
  Bottom Layer w10: v1(2640,2275) 2640,2000 2660,1980 2790,1980 2940,1830 v1(4590,1830)
VIN: B1.1 C1.2 R3.2 R17.2 T2.1 T3.2 | length 7080.5
  Top Layer w50: C1.2 2311.3,6513.7 2545,6280 2810,6280 T3.2 3480,6285 ; R3.2 3750,4585 v2(3810,4645) ; v2(3345,6555) 3480,6420 3480,6285 ; v2(3425,7590) 3456.56,7590 3675,7808.44 R17.2 ; T2.1 3617.6,6147.4 3480,6285 ; B1.1 3490,5455 3120.71,5824.29 3120.71,5865.71 3480,6225 3480,6285
  Bottom Layer w50: v2(3345,6555) 3425,6635 v2(3425,7590) ; v2(3500,5450) 3500,5305 3230.71,5035.71 3230.71,4994.29 3580,4645 v2(3810,4645)
pads on no net: IC2A.1 IC2A.2 IC2A.3 IC2B.5 IC2B.6 IC2B.7 K12.6 K12.8 RE1.14 U1.4 U1.5 U1.6 U1.7 U1.8 U1.9 U1.12 U1.13 U1.18 U1.19 U1.36 U1.37

## Text inside footprints (layer, text, board x,y; h text height)
B1: Top Overlay "~" at 4429.98,5235 h60 r90; Top Overlay "~" at 4429.98,5435 h60 r90; Top Overlay "-" at 4174.99,5235 h60 r90; Top Overlay "+" at 4170,5435 h60 r90
B2: Top Overlay "~" at 2640,5145.02 h60; Top Overlay "~" at 2840,5145.02 h60; Top Overlay "-" at 2640,5400.01 h60; Top Overlay "+" at 2840,5405 h60
K11: Top Overlay "1" at 3570,3260 h50 r90; Top Overlay "2" at 3470,3240 h50 r90; Top Overlay "5" at 3570,3600 h50 r90; Top Overlay "6" at 3470,3600 h50 r90
K12: Top Overlay "2" at 1710,3690 h50 r270; Top Overlay "1" at 1610,3670 h50 r270; Top Overlay "9" at 1610,3130 h50 r270; Top Overlay "10" at 1710,3130 h50 r270